# Altium PCB SmartToy_MainBoard_REV02 PCB.PcbDoc (part 2 of 3)
Units mm, origin at the board's own origin, x right, y up, seen from the top; angles counter-clockwise.
Board outline 55 x 50 mm, 2 copper layers (Top Layer, Bottom Layer), stack 0.98 mm thick; 120 components, 113 nets, 389 pads, 211 vias.
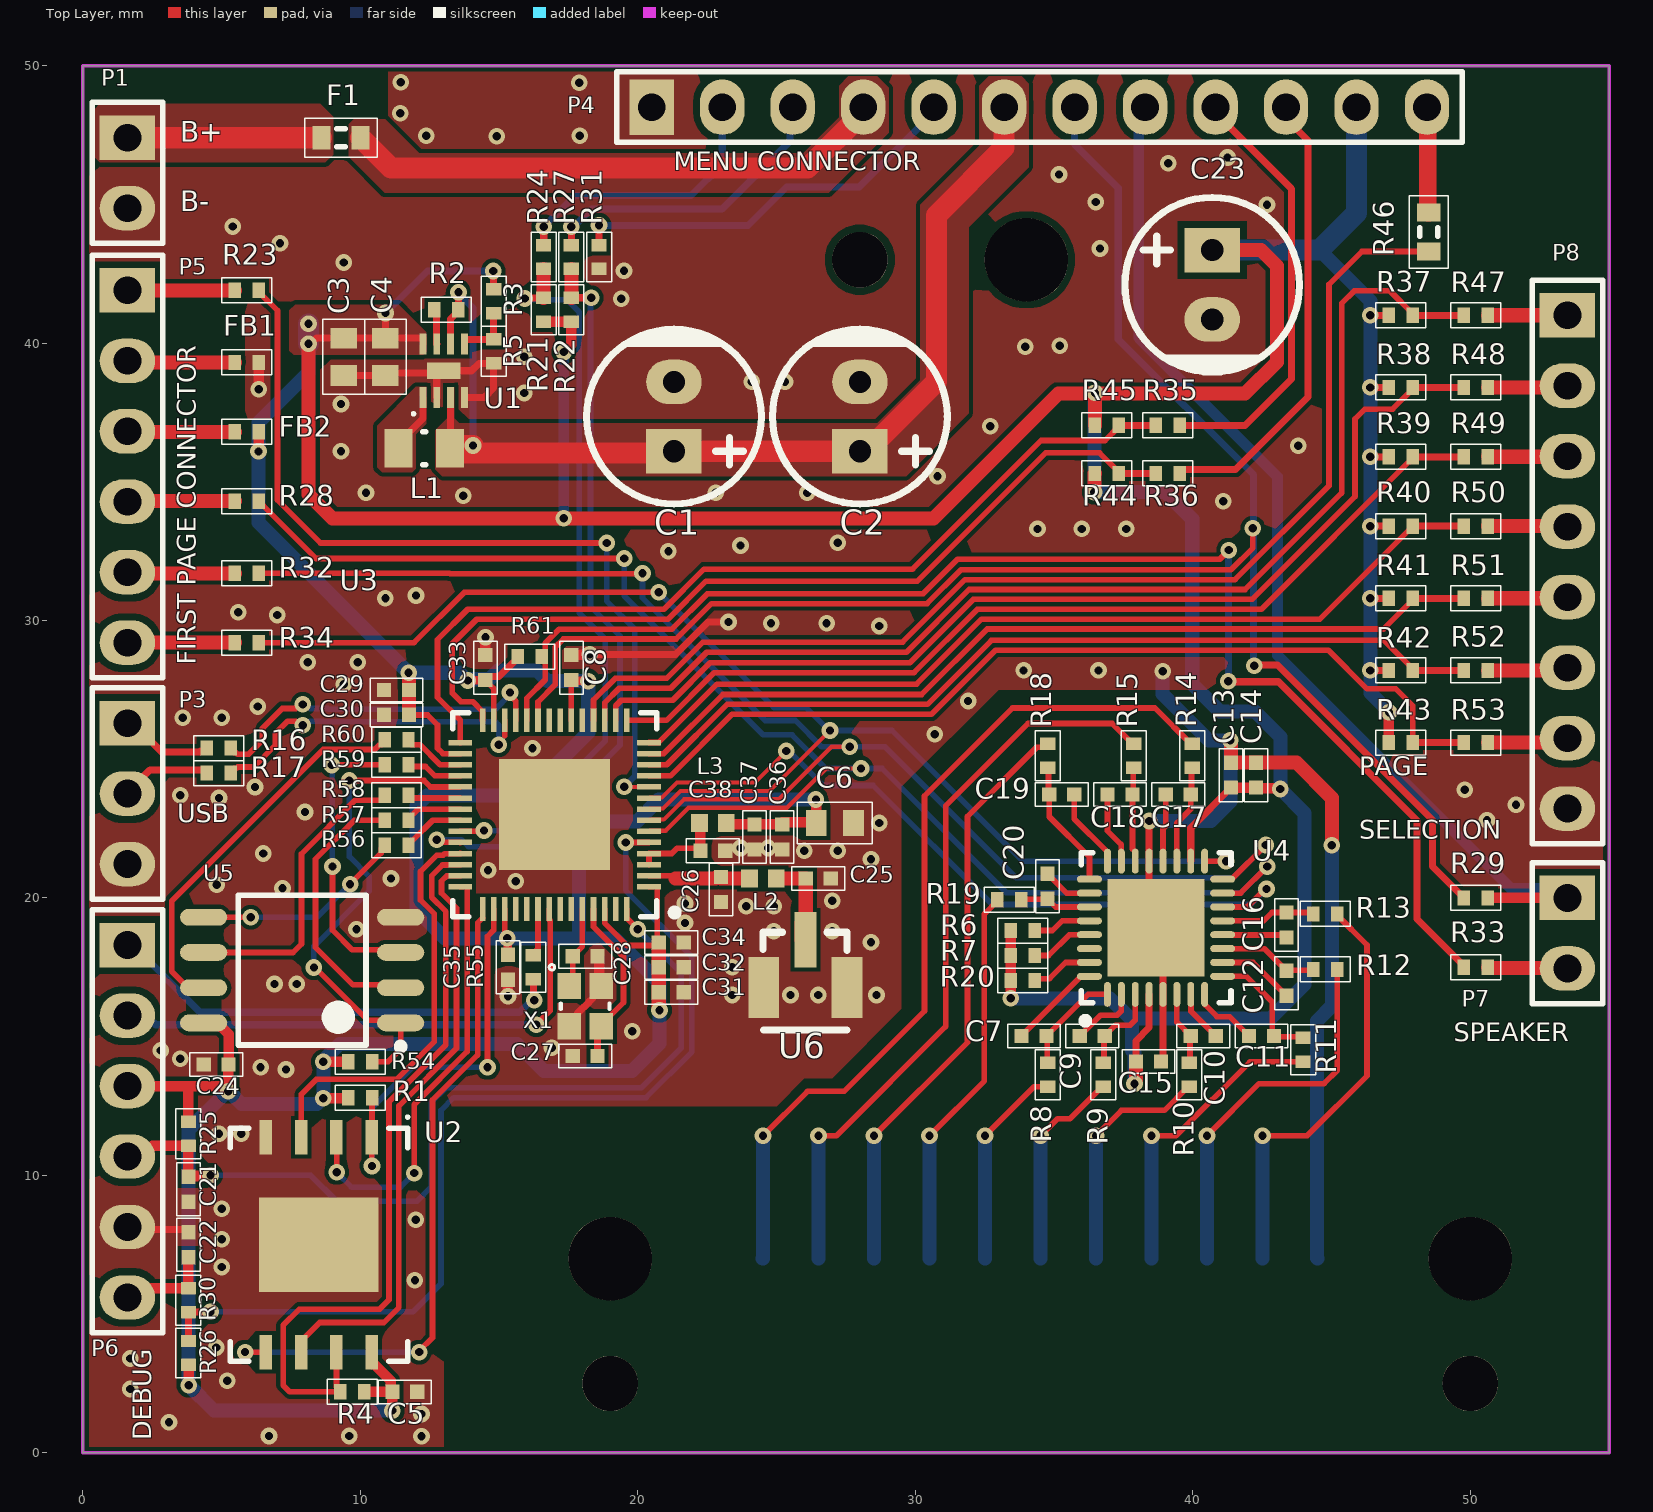
[diagram p0: Top Layer view]

## Part data (continued)
R6 R7 R8 R9 R10 R11 R12 R13 R14 R15 R18 R19: library part RES_SMD, "RES SMD 4.7K OHM 1% 1/16W 0402", Case Code (Imperial)=0402, Case Code (Metric)=1005, Manufacturer=Yageo, Manufacturer Part Number=RC0402FR-074K7L, Max Operating Temperature=155°C, Min Operating Temperature=-55°C, Power Rating=62.5mW, Resistance=4.7kR, Resistor Type="Thick Film", Supplier Part Number 1=311-4.7KLRCT-ND, Temperature Coefficient=100ppm/°C, Tolerance=1%, Voltage Rating=50V, Case/Package=0402, ComponentLink1Description=https://datasheet.ciiva.com/7850/1018594-7850022.pdf?src-supplier=Element14, ComponentLink1URL=https://datasheet.ciiva.com/7850/1018594-7850022.pdf?src-supplier=Element14, ComponentLink2Description=https://datasheet.ciiva.com/7850/1018594-7850023.pdf?src-supplier=Element14, ComponentLink2URL=https://datasheet.ciiva.com/7850/1018594-7850023.pdf?src-supplier=Element14, ComponentLink3Description=https://datasheet.ciiva.com/15215/getdatasheetpartid-328119-15215035.pdf?src-supplier=Verical, ComponentLink3URL=https://datasheet.ciiva.com/15215/getdatasheetpartid-328119-15215035.pdf?src-supplier=Verical, ComponentLink4Description=https://datasheet.ciiva.com/22661/1686128-22661342.pdf?src-supplier=Element14, ComponentLink4URL=https://datasheet.ciiva.com/22661/1686128-22661342.pdf?src-supplier=Element14, Depth=0.5mm, Height=0.32mm, Lead Free="Lead Free", Length=1mm, Military Standard=Not, Number of Pins=2, Packaging="Tape and Reel", Pricing 1="1 = 0.10000, 10 = 0.01400, 100 = 0.00580, 1000 = 0.00260, 2500 = 0.00226, 5000 = 0.00186 (USD)", REACH SVHC="No SVHC", RoHS=Yes, Stock 1=10584879, Supplier 1=Digi-Key, Termination=SMD/SMT, Voltage Rating (DC)=50V, Width=0.5mm
R16 R17: library part RES_SMD, "RES SMD 0 OHM JUMPER 1/16W 0402", Case Code (Imperial)=0402, Case Code (Metric)=1005, Manufacturer=Yageo, Manufacturer Part Number=RC0402FR-070RL, Max Operating Temperature=155°C, Min Operating Temperature=-55°C, Power Rating=62.5mW, Resistance=0mR, Resistor Type="Thick Film", Supplier Part Number 1=311-0.0LRCT-ND, Temperature Coefficient=200ppm/°C, Tolerance=1%, Voltage Rating=50V, Case/Package=0402, ComponentLink1Description=https://datasheet.ciiva.com/8896/pyu-rc0402-51-rohs-l-6-8896149.pdf?src-supplier=Avnet, ComponentLink1URL=https://datasheet.ciiva.com/8896/pyu-rc0402-51-rohs-l-6-8896149.pdf?src-supplier=Avnet, ComponentLink2Description=https://datasheet.ciiva.com/16790/pyu-rc0402-51-rohs-l-6-r-16790444.pdf?src-supplier=Future+Electronics, ComponentLink2URL=https://datasheet.ciiva.com/16790/pyu-rc0402-51-rohs-l-6-r-16790444.pdf?src-supplier=Future+Electronics, ComponentLink3Description=https://datasheet.ciiva.com/28419/pyu-rc0402-51-rohs-l-6-28419661.pdf?src-supplier=Avnet+Europe, ComponentLink3URL=https://datasheet.ciiva.com/28419/pyu-rc0402-51-rohs-l-6-28419661.pdf?src-supplier=Avnet+Europe, ComponentLink4Description=https://datasheet.ciiva.com/16869/pyu-rc0402-51-rohs-l-6-16869518.pdf?src-supplier=Avnet+Europe, ComponentLink4URL=https://datasheet.ciiva.com/16869/pyu-rc0402-51-rohs-l-6-16869518.pdf?src-supplier=Avnet+Europe, Contact Plating=Tin,Matte, Height=0.35mm, Lead Free="Lead Free", Length=1mm, Mount="Surface Mount", Packaging="Tape and Reel", Pricing 1="1 = 0.10000, 10 = 0.01200, 25 = 0.00840, 50 = 0.00640, 100 = 0.00470, 250 = 0.00360, 500 = 0.00288, 1000 = 0.00212, 5000 = 0.00152 (USD)", Radiation Hardening=No, RoHS=Yes, Stock 1=3964331, Supplier 1=Digi-Key, Termination=SMD/SMT, Width=0.5mm
R20 R21 R22 R37 R38 R39 R40 R41 R42 R43 R44 R45: library part RES_SMD, "RES SMD 100K OHM 1% 1/16W 0402", Case Code (Imperial)=0402, Case Code (Metric)=1005, Manufacturer=Yageo, Manufacturer Part Number=RC0402FR-07100KL, Max Operating Temperature=155°C, Max Power Dissipation=63mW, Min Operating Temperature=-55°C, Package Quantity=1, Resistance=100kR, Resistor Type="Thick Film", Supplier Part Number 1=311-100KJRCT-ND, Temperature Coefficient=100ppm/°C, Tolerance=1%, Voltage Rating=50V, Case/Package=0402, ComponentLink1Description=https://datasheet.ciiva.com/11808/0900766b80f96399-11808107.pdf?src-supplier=RSComponents, ComponentLink1URL=https://datasheet.ciiva.com/11808/0900766b80f96399-11808107.pdf?src-supplier=RSComponents, ComponentLink2Description=https://datasheet.ciiva.com/7983/443971-7983593.pdf?src-supplier=Element14, ComponentLink2URL=https://datasheet.ciiva.com/7983/443971-7983593.pdf?src-supplier=Element14, ComponentLink3Description=https://datasheet.ciiva.com/46440/1868787-46440889.pdf?src-supplier=Element14, ComponentLink3URL=https://datasheet.ciiva.com/46440/1868787-46440889.pdf?src-supplier=Element14, ComponentLink4Description=https://datasheet.ciiva.com/7746/1738695-7746234.pdf?src-supplier=Element14, ComponentLink4URL=https://datasheet.ciiva.com/7746/1738695-7746234.pdf?src-supplier=Element14, ComponentLink5Description=https://datasheet.ciiva.com/7746/1738695-7746235.pdf?src-supplier=Element14, ComponentLink5URL=https://datasheet.ciiva.com/7746/1738695-7746235.pdf?src-supplier=Element14, ComponentLink6Description=https://datasheet.ciiva.com/22747/443971-22747516.pdf?src-supplier=Element14, ComponentLink6URL=https://datasheet.ciiva.com/22747/443971-22747516.pdf?src-supplier=Element14, ComponentLink7Description=https://datasheet.ciiva.com/7850/1018594-7850133.pdf?src-supplier=Element14, ComponentLink7URL=https://datasheet.ciiva.com/7850/1018594-7850133.pdf?src-supplier=Element14, ComponentLink8Description=https://datasheet.ciiva.com/2491/pyu-r-int-thick-7-2491207.pdf?src-supplier=Digi-Key, ComponentLink8URL=https://datasheet.ciiva.com/2491/pyu-r-int-thick-7-2491207.pdf?src-supplier=Digi-Key, ComponentLink9Description=https://datasheet.ciiva.com/2491/pyu-r-int-thick-7-2491208.pdf?src-supplier=Digi-Key, ComponentLink9URL=https://datasheet.ciiva.com/2491/pyu-r-int-thick-7-2491208.pdf?src-supplier=Digi-Key, ComponentLink10Description=https://datasheet.ciiva.com/2491/pyu-r-int-thick-7-2491209.pdf?src-supplier=Digi-Key, ComponentLink10URL=https://datasheet.ciiva.com/2491/pyu-r-int-thick-7-2491209.pdf?src-supplier=Digi-Key, ComponentLink11Description=https://datasheet.ciiva.com/17052/pyu-rc0402-51-rohs-l-6-r-17052137.pdf?src-supplier=Future+Electronics, ComponentLink11URL=https://datasheet.ciiva.com/17052/pyu-rc0402-51-rohs-l-6-r-17052137.pdf?src-supplier=Future+Electronics, ComponentLink12Description=https://datasheet.ciiva.com/12668/pyu-rc0402-51-rohs-l-6-r-12668218.pdf?src-supplier=Mouser, ComponentLink12URL=https://datasheet.ciiva.com/12668/pyu-rc0402-51-rohs-l-6-r-12668218.pdf?src-supplier=Mouser, ComponentLink13Description=https://datasheet.ciiva.com/46394/1018594-46394941.pdf?src-supplier=Element14, ComponentLink13URL=https://datasheet.ciiva.com/46394/1018594-46394941.pdf?src-supplier=Element14, Depth=0.5mm, Features="Moisture Resistant", Height=0.016inch, Lead Free="Lead Free", Length=1mm, Military Standard=Not, Number of Terminations=2, Packaging="Tape and Reel", Power Rating=63mW, Pricing 1="1 = 0.10000, 10 = 0.01200, 100 = 0.00480, 1000 = 0.00215, 2500 = 0.00186, 5000 = 0.00154 (USD)", REACH SVHC=Unknown, RoHS=Yes, Stock 1=3850330, Supplier 1=Digi-Key, Termination=SMD/SMT, Width=0.02inch
R23 R24 R27 R28 R32 R34 R35 R36 R47 R48 R49 R50 R51 R52 R53: library part RES_SMD, "Surface Mount Chip Resistor, Thick Film, RC Series, 1 kohm, 62.5 mW, 1%, 50 V, 0402 [1005 Metric]", Case Code (Imperial)=0402, Case Code (Metric)=1005, Manufacturer 1=Yageo, Manufacturer Part Number 1=RC0402FR-071KL, Max Operating Temperature=155°C, Max Power Dissipation=63mW, Min Operating Temperature=-55°C, Power Rating=62.5mW, Resistance=1kR, Resistance Tolerance=1%, Resistor Type="Thick Film", Supplier Part Number 1=311-1.00KLRCT-ND, Temperature Coefficient=100ppm/°C, Voltage Rating=50V, Case/Package=0402, Category="Chip SMD Resistors", ComponentLink1Description=https://datasheet.ciiva.com/11819/0900766b80c66297-11819477.pdf?src-supplier=RSComponents, ComponentLink1URL=https://datasheet.ciiva.com/11819/0900766b80c66297-11819477.pdf?src-supplier=RSComponents, ComponentLink2Description=https://datasheet.ciiva.com/7983/1018594-7983502.pdf?src-supplier=Element14, ComponentLink2URL=https://datasheet.ciiva.com/7983/1018594-7983502.pdf?src-supplier=Element14, ComponentLink3Description=https://datasheet.ciiva.com/22747/1018594-22747513.pdf?src-supplier=Element14, ComponentLink3URL=https://datasheet.ciiva.com/22747/1018594-22747513.pdf?src-supplier=Element14, ComponentLink4Description=https://datasheet.ciiva.com/12666/pyu-rc0402-51-rohs-l-6-r-12666741.pdf?src-supplier=Mouser, ComponentLink4URL=https://datasheet.ciiva.com/12666/pyu-rc0402-51-rohs-l-6-r-12666741.pdf?src-supplier=Mouser, ComponentLink5Description=https://datasheet.ciiva.com/7849/1018594-7849869.pdf?src-supplier=Element14, ComponentLink5URL=https://datasheet.ciiva.com/7849/1018594-7849869.pdf?src-supplier=Element14, ComponentLink6Description=https://datasheet.ciiva.com/7849/1018594-7849871.pdf?src-supplier=Element14, ComponentLink6URL=https://datasheet.ciiva.com/7849/1018594-7849871.pdf?src-supplier=Element14, ComponentLink7Description=https://datasheet.ciiva.com/17063/pyu-rc0402-51-rohs-l-6-r-17063193.pdf?src-supplier=Future+Electronics, ComponentLink7URL=https://datasheet.ciiva.com/17063/pyu-rc0402-51-rohs-l-6-r-17063193.pdf?src-supplier=Future+Electronics, Construction=Rectangular, Depth=0.5mm, Features="Moisture Resistant", Height=0.32mm, Lead Free="Lead Free", Length=1mm, Military Standard=Not, Mouting Technology=SMT, Number of Pins=2, Number of Terminations=2, Packaging="Tape and Reel", Pin=2, Pricing 1="1=0.10000, 10=0.01600, 100=0.00660, 1000=0.00299, 2500=0.00259, 5000=0.00214 (USD)", REACH SVHC=Unknown, RoHS=Yes, RoHS Compliant=Yes, Series=RC, Size Code=0402, Supplier 1=Digi-Key, Technology="THICK FILM", Termination=SMD/SMT, Tolerance=1%, Voltage Rating (DC)=50V, Width=0.5mm
R25 R26 R61: library part RES_SMD, "RES SMD 10K OHM 1% 1/16W 0402", Case Code (Imperial)=0402, Case Code (Metric)=1005, Manufacturer=Yageo, Manufacturer Part Number=RC0402FR-0710KL, Max Operating Temperature=155°C, Min Operating Temperature=-55°C, Power Rating=62.5mW, Resistance=10kR, Supplier Part Number 1=311-10.0KLRTR-ND, Temperature Coefficient=100ppm/°C, Tolerance=1%, Voltage Rating=50V, Case/Package=0402, ComponentLink1Description=https://datasheet.ciiva.com/7660/38568-7660787.pdf?src-supplier=Element14, ComponentLink1URL=https://datasheet.ciiva.com/7660/38568-7660787.pdf?src-supplier=Element14, ComponentLink2Description=https://datasheet.ciiva.com/7849/1784430-7849813.pdf?src-supplier=Element14, ComponentLink2URL=https://datasheet.ciiva.com/7849/1784430-7849813.pdf?src-supplier=Element14, ComponentLink3Description=https://datasheet.ciiva.com/7849/1686128-7849814.pdf?src-supplier=Element14, ComponentLink3URL=https://datasheet.ciiva.com/7849/1686128-7849814.pdf?src-supplier=Element14, ComponentLink4Description=https://datasheet.ciiva.com/7849/1784430-7849815.pdf?src-supplier=Element14, ComponentLink4URL=https://datasheet.ciiva.com/7849/1784430-7849815.pdf?src-supplier=Element14, ComponentLink5Description=https://datasheet.ciiva.com/22747/1018594-22747512.pdf?src-supplier=Element14, ComponentLink5URL=https://datasheet.ciiva.com/22747/1018594-22747512.pdf?src-supplier=Element14, ComponentLink6Description=https://datasheet.ciiva.com/12667/pyu-rc0402-51-rohs-l-6-r-12667067.pdf?src-supplier=Mouser, ComponentLink6URL=https://datasheet.ciiva.com/12667/pyu-rc0402-51-rohs-l-6-r-12667067.pdf?src-supplier=Mouser, ComponentLink7Description=https://datasheet.ciiva.com/7983/1018594-7983486.pdf?src-supplier=Element14, ComponentLink7URL=https://datasheet.ciiva.com/7983/1018594-7983486.pdf?src-supplier=Element14, Composition="Thick Film", Depth=0.5mm, Height=0.32mm, Lead Free="Lead Free", Lead Pitch=0.2mm, Length=1mm, Military Standard=Not, Number of Pins=2, Number of Terminations=2, Packaging="Tape and Reel", Pricing 1="10000 = 0.001630, 30000 = 0.001440, 50000 = 0.001320, 100000 = 0.001290 (USD)", REACH SVHC="No SVHC", RoHS=Yes, Stock 1=58760000, Supplier 1=Digi-Key, Termination=SMD/SMT, Voltage Rating (DC)=50V, Width=0.5mm, Working Voltage=50V
R29 R33: library part RES_SMD, "YAGEO - RC0402FR-0727RL - Résistance à puce CMS, Couche épaisse, 0402 [1005 Metric], 27 ohm, Série RC, 50 V, Couche épaisse", Case Code (Imperial)=0402, Case Code (Metric)=1005, Manufacturer 1=Yageo, Manufacturer Part Number 1=RC0402FR-0727RL, Max Operating Temperature=155°C, Max Power Dissipation=63mW, Min Operating Temperature=-55°C, Power Rating=62.5mW, Resistance Tolerance=1%, Resistor Type="Thick Film", Supplier Part Number 1=YAG3086CT-ND, Temperature Coefficient=100ppm/°C, Voltage Rating=50V, Case/Package=0402, Category="Chip SMD Resistors", ComponentLink1Description=https://datasheet.ciiva.com/11808/0900766b80c66297-11808450.pdf?src-supplier=RSComponents, ComponentLink1URL=https://datasheet.ciiva.com/11808/0900766b80c66297-11808450.pdf?src-supplier=RSComponents, ComponentLink2Description=https://datasheet.ciiva.com/7849/1018594-7849926.pdf?src-supplier=Element14, ComponentLink2URL=https://datasheet.ciiva.com/7849/1018594-7849926.pdf?src-supplier=Element14, ComponentLink3Description=https://datasheet.ciiva.com/7849/1018594-7849927.pdf?src-supplier=Element14, ComponentLink3URL=https://datasheet.ciiva.com/7849/1018594-7849927.pdf?src-supplier=Element14, ComponentLink4Description=https://datasheet.ciiva.com/17044/pyu-rc0402-51-rohs-l-6-17044345.pdf?src-supplier=Future+Electronics, ComponentLink4URL=https://datasheet.ciiva.com/17044/pyu-rc0402-51-rohs-l-6-17044345.pdf?src-supplier=Future+Electronics, ComponentLink5Description=https://datasheet.ciiva.com/15189/getdatasheetpartid-327852-15189402.pdf?src-supplier=Verical, ComponentLink5URL=https://datasheet.ciiva.com/15189/getdatasheetpartid-327852-15189402.pdf?src-supplier=Verical, Construction=Rectangular, Depth=0.5mm, Features="Moisture Resistant", Height=0.016inch, Lead Free="Lead Free", Length=1mm, Military Standard=Not, Mouting Technology=SMT, Number of Terminations=2, Packaging="Tape and Reel", Pin=2, Pricing 1="1=0.10000, 10=0.01600, 100=0.00660, 1000=0.00299, 2500=0.00259, 5000=0.00214 (USD)", REACH SVHC=Unknown, Resistance=27R, RoHS=Yes, RoHS Compliant=Yes, Series=RC, Size Code=0402, Stock 1=378577, Supplier 1=Digi-Key, Technology="THICK FILM", Termination=SMD/SMT, Tolerance=1%, Weight=2.3E-05oz, Width=0.5mm
R30 R31: library part RES_SMD, "RES SMD 100 OHM 5% 1/16W 0402", Case Code (Imperial)=0402, Case Code (Metric)=1005, Manufacturer=Yageo, Manufacturer Part Number=RC0402FR-07100RL, Max Operating Temperature=155°C, Min Operating Temperature=-55°C, Power Rating=62.5mW, Resistance=100R, Resistor Type="Thick Film", Supplier Part Number 1=311-100LRCT-ND, Temperature Coefficient=100ppm/°C, Tolerance=1%, Voltage Rating=50V, Case/Package=0402, ComponentLink1Description=https://datasheet.ciiva.com/7850/1018594-7850134.pdf?src-supplier=Element14, ComponentLink1URL=https://datasheet.ciiva.com/7850/1018594-7850134.pdf?src-supplier=Element14, ComponentLink2Description=https://datasheet.ciiva.com/7850/1018594-7850135.pdf?src-supplier=Element14, ComponentLink2URL=https://datasheet.ciiva.com/7850/1018594-7850135.pdf?src-supplier=Element14, ComponentLink3Description=https://datasheet.ciiva.com/2452/pyu-r-int-thick-7-2452617.pdf?src-supplier=Digi-Key, ComponentLink3URL=https://datasheet.ciiva.com/2452/pyu-r-int-thick-7-2452617.pdf?src-supplier=Digi-Key, ComponentLink4Description=https://datasheet.ciiva.com/2452/pyu-r-int-thick-7-2452618.pdf?src-supplier=Digi-Key, ComponentLink4URL=https://datasheet.ciiva.com/2452/pyu-r-int-thick-7-2452618.pdf?src-supplier=Digi-Key, ComponentLink5Description=https://datasheet.ciiva.com/2452/pyu-r-int-thick-7-2452619.pdf?src-supplier=Digi-Key, ComponentLink5URL=https://datasheet.ciiva.com/2452/pyu-r-int-thick-7-2452619.pdf?src-supplier=Digi-Key, ComponentLink6Description=https://datasheet.ciiva.com/16740/pyu-rc0402-51-rohs-l-6-r-16740924.pdf?src-supplier=Future+Electronics, ComponentLink6URL=https://datasheet.ciiva.com/16740/pyu-rc0402-51-rohs-l-6-r-16740924.pdf?src-supplier=Future+Electronics, ComponentLink7Description=https://datasheet.ciiva.com/12577/pyu-rc0402-51-rohs-l-6-r-12577725.pdf?src-supplier=Mouser, ComponentLink7URL=https://datasheet.ciiva.com/12577/pyu-rc0402-51-rohs-l-6-r-12577725.pdf?src-supplier=Mouser, ComponentLink8Description=https://datasheet.ciiva.com/46394/1018594-46394943.pdf?src-supplier=Element14, ComponentLink8URL=https://datasheet.ciiva.com/46394/1018594-46394943.pdf?src-supplier=Element14, ComponentLink9Description=https://datasheet.ciiva.com/7849/1784430-7849810.pdf?src-supplier=Element14, ComponentLink9URL=https://datasheet.ciiva.com/7849/1784430-7849810.pdf?src-supplier=Element14, ComponentLink10Description=https://datasheet.ciiva.com/11808/0900766b80c66297-11808765.pdf?src-supplier=RSComponents, ComponentLink10URL=https://datasheet.ciiva.com/11808/0900766b80c66297-11808765.pdf?src-supplier=RSComponents, ComponentLink11Description=https://datasheet.ciiva.com/12667/pyu-rc0402-51-rohs-l-6-r-12667957.pdf?src-supplier=Mouser, ComponentLink11URL=https://datasheet.ciiva.com/12667/pyu-rc0402-51-rohs-l-6-r-12667957.pdf?src-supplier=Mouser, ComponentLink12Description=https://datasheet.ciiva.com/16740/pyu-rc0402-51-rohs-l-6-r-16740566.pdf?src-supplier=Future+Electronics, ComponentLink12URL=https://datasheet.ciiva.com/16740/pyu-rc0402-51-rohs-l-6-r-16740566.pdf?src-supplier=Future+Electronics, ComponentLink13Description=https://datasheet.ciiva.com/15189/getdatasheetpartid-329466-15189335.pdf?src-supplier=Verical, ComponentLink13URL=https://datasheet.ciiva.com/15189/getdatasheetpartid-329466-15189335.pdf?src-supplier=Verical, ComponentLink14Description=https://datasheet.ciiva.com/22747/1018594-22747511.pdf?src-supplier=Element14, ComponentLink14URL=https://datasheet.ciiva.com/22747/1018594-22747511.pdf?src-supplier=Element14, ComponentLink15Description=https://datasheet.ciiva.com/28367/1018594-28367226.pdf?src-supplier=Element14, ComponentLink15URL=https://datasheet.ciiva.com/28367/1018594-28367226.pdf?src-supplier=Element14, Depth=0.5mm, Height=0.32mm, Lead Free="Lead Free", Length=1mm, Military Standard=Not, Number of Pins=2, Packaging="Tape and Reel", Pricing 1="1 = 0.10000, 10 = 0.01400, 100 = 0.00580, 1000 = 0.00260, 2500 = 0.00226, 5000 = 0.00186 (USD)", REACH SVHC="No SVHC", RoHS=Yes, Stock 1=18149776, Supplier 1=Digi-Key, Termination=SMD/SMT, Voltage Rating (DC)=50V, Width=0.5mm
R46: library part RES_SMD, "YAGEO (PHYCOMP) - RC0603FR-07330RL - RES, THICK FILM, 330R, 1%, 0.1W, 0603", Case Code (Imperial)=0603, Case Code (Metric)=1608, Manufacturer 1=Yageo, Manufacturer Part Number 1=RC0603FR-07330RL, Max Operating Temperature=155°C, Max Power Dissipation=100mW, Min Operating Temperature=-55°C, Package Quantity=1, Resistance Tolerance=1%, Resistor Type="Thick Film", Supplier Part Number 1=311-330HRCT-ND, Temperature Coefficient=100ppm/°C, Voltage Rating=50V, Case/Package=0603, Category="Chip SMD Resistors", ComponentLink1Description=https://datasheet.ciiva.com/11819/0900766b80f96399-11819327.pdf?src-supplier=RSComponents, ComponentLink1URL=https://datasheet.ciiva.com/11819/0900766b80f96399-11819327.pdf?src-supplier=RSComponents, ComponentLink2Description=https://datasheet.ciiva.com/2454/pyu-r-int-thick-7-2454864.pdf?src-supplier=Digi-Key, ComponentLink2URL=https://datasheet.ciiva.com/2454/pyu-r-int-thick-7-2454864.pdf?src-supplier=Digi-Key, ComponentLink3Description=https://datasheet.ciiva.com/2454/pyu-r-int-thick-7-2454865.pdf?src-supplier=Digi-Key, ComponentLink3URL=https://datasheet.ciiva.com/2454/pyu-r-int-thick-7-2454865.pdf?src-supplier=Digi-Key, ComponentLink4Description=https://datasheet.ciiva.com/2454/pyu-r-int-thick-7-2454866.pdf?src-supplier=Digi-Key, ComponentLink4URL=https://datasheet.ciiva.com/2454/pyu-r-int-thick-7-2454866.pdf?src-supplier=Digi-Key, ComponentLink5Description=https://datasheet.ciiva.com/12555/rc0603-272842-12555334.pdf?src-supplier=Mouser, ComponentLink5URL=https://datasheet.ciiva.com/12555/rc0603-272842-12555334.pdf?src-supplier=Mouser, ComponentLink6Description=https://datasheet.ciiva.com/46440/1868787-46440904.pdf?src-supplier=Element14, ComponentLink6URL=https://datasheet.ciiva.com/46440/1868787-46440904.pdf?src-supplier=Element14, ComponentLink7Description=https://datasheet.ciiva.com/7746/443971-7746329.pdf?src-supplier=Element14, ComponentLink7URL=https://datasheet.ciiva.com/7746/443971-7746329.pdf?src-supplier=Element14, ComponentLink8Description=https://datasheet.ciiva.com/7746/443971-7746330.pdf?src-supplier=Element14, ComponentLink8URL=https://datasheet.ciiva.com/7746/443971-7746330.pdf?src-supplier=Element14, ComponentLink9Description=https://datasheet.ciiva.com/7746/1686128-7746331.pdf?src-supplier=Element14, ComponentLink9URL=https://datasheet.ciiva.com/7746/1686128-7746331.pdf?src-supplier=Element14, Depth=0.8mm, Features="Moisture Resistant", Height=0.45mm, Lead Free="Lead Free", Length=1.6mm, Mouting Technology=SMT, Number of Pins=2, Number of Terminations=2, Packaging="Tape and Reel", Pin=2, Power Rating=100mW, Pricing 1="1=0.10000, 10=0.02400, 100=0.00970, 1000=0.00436, 2500=0.00378 (USD)", REACH SVHC="No SVHC", Resistance=330R, RoHS=Yes, RoHS Compliant=Yes, Series=RC, Size Code=0603, Stock 1=1325793, Supplier 1=Digi-Key, Technology="THICK FILM", Termination=SMD/SMT, Tolerance=1%, Voltage Rating (DC)=50V, Width=0.8mm
R55: library part RES_SMD, "RES SMD 499 OHM 5% 1/16W 0402", Case Code (Imperial)=0402, Case Code (Metric)=1005, Manufacturer 1=Yageo, Manufacturer Part Number 1=RC0402FR-07499RL, Max Operating Temperature=155°C, Max Power Dissipation=63mW, Min Operating Temperature=-55°C, Package Quantity=1, Power Rating=62.5mW, Resistance=499R, Resistance Tolerance=1%, Resistor Type="Thick Film", Supplier Part Number 1=311-499LRCT-ND, Temperature Coefficient=100ppm/°C, Voltage Rating=50V, Case/Package=0402, Category="Chip SMD Resistors", ComponentLink1Description=https://datasheet.ciiva.com/2453/pyu-r-int-thick-7-2453538.pdf?src-supplier=Digi-Key, ComponentLink1URL=https://datasheet.ciiva.com/2453/pyu-r-int-thick-7-2453538.pdf?src-supplier=Digi-Key, ComponentLink2Description=https://datasheet.ciiva.com/2453/pyu-r-int-thick-7-2453539.pdf?src-supplier=Digi-Key, ComponentLink2URL=https://datasheet.ciiva.com/2453/pyu-r-int-thick-7-2453539.pdf?src-supplier=Digi-Key, ComponentLink3Description=https://datasheet.ciiva.com/2453/pyu-r-int-thick-7-2453540.pdf?src-supplier=Digi-Key, ComponentLink3URL=https://datasheet.ciiva.com/2453/pyu-r-int-thick-7-2453540.pdf?src-supplier=Digi-Key, Construction=Rectangular, Depth=0.5mm, Features="Moisture Resistant", Height=0.016inch, Lead Free="Lead Free", Length=1mm, Military Standard=Not, Mouting Technology=SMT, Number of Terminations=2, Packaging="Tape and Reel", Pin=2, Pricing 1="1=0.10000, 10=0.01600, 100=0.00660, 1000=0.00299, 2500=0.00259, 5000=0.00214 (USD)", REACH SVHC="No SVHC", RoHS=Yes, RoHS Compliant=Yes, Series=RC, Size Code=0402, Stock 1=2245904, Supplier 1=Digi-Key, Termination=SMD/SMT, Tolerance=1%, Voltage Rating (DC)=50V, Width=0.02inch
R56 R57 R58 R59 R60: library part RES_SMD, "RES SMD 0 OHM JUMPER 1/16W 0402", Case Code (Imperial)=0402, Case Code (Metric)=1005, Manufacturer 1=Yageo, Manufacturer Part Number 1=RC0402FR-070RL, Max Operating Temperature=155°C, Max Power Dissipation=63mW, Min Operating Temperature=-55°C, Power Rating=62.5mW, Resistance=0R, Resistor Type="Thick Film", Supplier Part Number 1=603-RC0402FR-070RL, Temperature Coefficient=200ppm/°C, Tolerance=1%, Voltage Rating=50V, Case/Package=0402, Category="Chip SMD Resistors", ComponentLink1Description=https://datasheet.ciiva.com/8896/pyu-rc0402-51-rohs-l-6-8896149.pdf?src-supplier=Avnet, ComponentLink1URL=https://datasheet.ciiva.com/8896/pyu-rc0402-51-rohs-l-6-8896149.pdf?src-supplier=Avnet, ComponentLink2Description=https://datasheet.ciiva.com/16790/pyu-rc0402-51-rohs-l-6-r-16790444.pdf?src-supplier=Future+Electronics, ComponentLink2URL=https://datasheet.ciiva.com/16790/pyu-rc0402-51-rohs-l-6-r-16790444.pdf?src-supplier=Future+Electronics, ComponentLink3Description=https://datasheet.ciiva.com/28419/pyu-rc0402-51-rohs-l-6-28419661.pdf?src-supplier=Avnet+Europe, ComponentLink3URL=https://datasheet.ciiva.com/28419/pyu-rc0402-51-rohs-l-6-28419661.pdf?src-supplier=Avnet+Europe, ComponentLink4Description=https://datasheet.ciiva.com/16869/pyu-rc0402-51-rohs-l-6-16869518.pdf?src-supplier=Avnet+Europe, ComponentLink4URL=https://datasheet.ciiva.com/16869/pyu-rc0402-51-rohs-l-6-16869518.pdf?src-supplier=Avnet+Europe, Contact Plating=Tin,Matte, Features="Moisture Resistant", Height=0.35mm, Lead Free="Lead Free", Length=1mm, Mount="Surface Mount", Mouting Technology=SMT, Number of Terminations=2, Packaging="Tape and Reel", Pin=2, Pricing 1="1=0.10000, 10=0.01000, 50=0.01000, 100=0.00400, 1000=0.00300, 10000=0.00200 (USD)", Radiation Hardening=No, RoHS=Yes, RoHS Compliant=Yes, Series=RC, Size Code=0402, Stock 1=204375, Supplier 1=Mouser, Termination=SMD/SMT, Width=0.5mm
U1: "IC REG BOOST ADJ 3.8A 8TDFN", Manufacturer 1=Microchip, Supplier Part Number 1=576-4863-1-ND, Category="Voltage Regulators - Switching", ComponentLink1Description=http://www.microchip.com/mymicrochip/filehandler.aspx?ddocname=en580778&src-supplier=Digi-Key, ComponentLink1URL=http://www.microchip.com/mymicrochip/filehandler.aspx?ddocname=en580778&src-supplier=Digi-Key, Manufacturer Part Number 1=MIC2875-AYMT-T5, Pricing 1="1=1.27000, 25=1.05000, 100=0.96000 (USD)", RoHS=No, Stock 1=322, Supplier 1=Digi-Key
U2: "IC FLASH 1G SPI 104MHZ 8WSON", Frequency=104MHz, Manufacturer 1=Winbond, Max Operating Temperature=85°C, Min Operating Temperature=-40°C, Supplier Part Number 1=W25N01GVZEIGCT-ND, Category=Memory, ComponentLink1Description=http://www.winbond.com/resource-files/w25n01gv%20revl%20050918%20unsecured.pdf?src-supplier=Digi-Key, ComponentLink1URL=http://www.winbond.com/resource-files/w25n01gv%20revl%20050918%20unsecured.pdf?src-supplier=Digi-Key, Interface=SPI,Serial, Manufacturer Part Number 1="W25N01GVZEIG TR", Memory Type=FLASH,NAND, Packaging="Tape and Reel", Pricing 1="1=3.21000, 10=2.88200, 25=2.83760, 50=2.83000, 100=2.52870, 250=2.44564, 500=2.43672, 1000=2.26904 (USD)", RoHS=Yes, RoHS Compliant=Yes, Stock 1=33713, Supplier 1=Digi-Key
U3: "RF System on a Chip - SoC SMD Wi-Fi IC, ESP32-S2, singal-core MCU, QFN 56-pin, 7*7 mm", Manufacturer 1="Espressif Systems", Manufacturer Part Number 1=ESP32-S2
U4: "Capacitive Touch Screen 11 Key 32-Pin VQFN EP T/R", Manufacturer 1=Microchip, Supplier Part Number 1=AT42QT1110-MURCT-ND, ComponentLink1Description=http://www.microchip.com/mymicrochip/filehandler.aspx?ddocname=en590256&src-supplier=Digi-Key, ComponentLink1URL=http://www.microchip.com/mymicrochip/filehandler.aspx?ddocname=en590256&src-supplier=Digi-Key, Manufacturer Part Number 1=AT42QT1110-MUR, Pricing 1="1=1.16000, 25=1.06000, 100=0.96200 (USD)", RoHS=No, Stock 1=4052, Supplier 1=Digi-Key
U5: library part "W25N01GVZEIG TR", "IC FLASH 128MBIT SPI/QUAD 8SOIC", Case/Package=SOIC, Frequency=133MHz, Manufacturer 1=Winbond, Max Operating Temperature=85°C, Min Operating Temperature=-40°C, Supplier Part Number 1=W25Q128JVSIM-ND, Category=Memory, ComponentLink1Description=http://www.winbond.com/resource-files/w25n01gv%20revl%20050918%20unsecured.pdf?src-supplier=Digi-Key, ComponentLink1URL=http://www.winbond.com/resource-files/w25n01gv%20revl%20050918%20unsecured.pdf?src-supplier=Digi-Key, ComponentLink2Description=http://www.winbond.com/resource-files/w25q128jv_dtr%20revc%2003272018%20plus.pdf?src-supplier=Digi-Key, ComponentLink2URL=http://www.winbond.com/resource-files/w25q128jv_dtr%20revc%2003272018%20plus.pdf?src-supplier=Digi-Key, Manufacturer Part Number 1=W25Q128JVSIM, Memory Size=128Mb, Memory Type=Non-Volatile,FLASH, Mount="Surface Mount", Packaging=Rail/Tube, Pricing 1="1=1.62000, 10=1.48100, 25=1.44080, 50=1.43360, 100=1.28140, 250=1.27772, 500=1.25844, 1000=1.20501, 5000=1.12190 (USD)", RoHS=Yes, RoHS Compliant=Yes, Stock 1=4617, Supplier 1=Digi-Key
U6: library part AntenaIPX, "CONN UMCC JACK STR 50OHM SMD", Case/Package=SMD/SMT, Dielectric Material=Polymer, Frequency=6GHz, Housing Color=Beige, Manufacturer="TE Connectivity AMP", Max Operating Temperature=194°C, Min Operating Temperature=-40°C, Package Quantity=1, Supplier Part Number 1=A118077CT-ND, Body Material="Polymer,Liquid Crystal Polymer", Body Plating=Gold, ComponentLink1Description=https://datasheet.ciiva.com/16312/eng-cd-1909763-b-16312469.pdf?src-supplier=Future+Electronics, ComponentLink1URL=https://datasheet.ciiva.com/16312/eng-cd-1909763-b-16312469.pdf?src-supplier=Future+Electronics, ComponentLink2Description=https://datasheet.ciiva.com/16469/eng-cd-1909763-b-16469221.pdf?src-supplier=Avnet+Asia, ComponentLink2URL=https://datasheet.ciiva.com/16469/eng-cd-1909763-b-16469221.pdf?src-supplier=Avnet+Asia, ComponentLink3Description=https://datasheet.ciiva.com/9423/eng-cd-1909763-b-9423785.pdf?src-supplier=Avnet, ComponentLink3URL=https://datasheet.ciiva.com/9423/eng-cd-1909763-b-9423785.pdf?src-supplier=Avnet, ComponentLink4Description=https://datasheet.ciiva.com/29191/eng-cd-1909763-b1-basefilename-29191146.pdf?src-supplier=Digi-Key, ComponentLink4URL=https://datasheet.ciiva.com/29191/eng-cd-1909763-b1-basefilename-29191146.pdf?src-supplier=Digi-Key, ComponentLink5Description=https://datasheet.ciiva.com/29191/eng-cd-1909763-b1-basefilename-29191148.pdf?src-supplier=Digi-Key, ComponentLink5URL=https://datasheet.ciiva.com/29191/eng-cd-1909763-b1-basefilename-29191148.pdf?src-supplier=Digi-Key, Connector System=Cable-to-Board, Connector Type=Jack, Contact Material="Copper Alloy", Contact Plating=Gold, ELV=Compliant, Fastening Type=Push,Pull, Gender=Female, Impedance=50R, Insulation Material=Thermoplastic, Lead Free="Lead Free", Length=3mm, Manufacturer Part Number=1909763-1, Max Frequency=6GHz, Mount=Panel, Number of Positions=1, Orientation=Straight, Packaging="Tape and Reel", Pricing 1="1 = 0.46000, 10 = 0.42900, 25 = 0.38600, 50 = 0.34300, 100 = 0.32860, 250 = 0.30008, 500 = 0.28578, 1000 = 0.23577, 2500 = 0.21434 (USD)", Radiation Hardening=No, RoHS=Yes, Sealable="No (Without)", Stock 1=175154, Supplier 1=Digi-Key, Termination=SMD/SMT
X1: library part "FA-128 32.0000MF10Z-AJ3", "CRYSTAL 40.0000MHZ 8PF SMD", Case/Package=DFN, Continuous Drain Current (ID)=22A, Drain to Source Voltage (Vdss)=60V, ESR (Equivalent Series Resistance)=60R, Frequency Stability=10ppm, Input Capacitance=2.2nF, Load Capacitance=8pF, Manufacturer 1=Abracon, Manufacturer Part Number 1=ABM11W-40.0000MHZ-8-B1U-T3, Max Operating Temperature=175°C, Max Power Dissipation=79W, Min Operating Temperature=-55°C, Supplier Part Number 1=535-13918-1-ND, ComponentLink1Description=https://abracon.com/Resonators/ABM11W.pdf?src-supplier=Digi-Key, ComponentLink1URL=https://abracon.com/Resonators/ABM11W.pdf?src-supplier=Digi-Key, Frequency=40MHz, Frequency Tolerance=10ppm, Mount="Surface Mount", Packaging="Cut Tape", Pricing 1="1=0.78000, 10=0.69000, 50=0.64500, 100=0.57000, 500=0.54000 (USD)", Rds On Max=4mR, RoHS=Yes, Stock 1=770, Supplier 1=Digi-Key

## Free pads (board coordinates)
  round 3 hole 3 unplated: H1(19,7) H3(50,7) H6(34,43)
  round 2 hole 2 unplated: H2(19,2.5) H4(50,2.5) H5(28,43)

## Via types
v1: diameter 0.6, hole 0.3, Top Layer to Bottom Layer, tented both sides, 211 vias

## Nets (pads, with @x,y where several pads share a name; then routed paths per layer and width w, separated by ;. In a path a pad name is that pad's centre, name@x,y a point inside that pad or via, vN(x,y) a via of type N, cw(c..) or ccw(c..) an arc to the next point about the centre after c; other vN are vias at no path point)
+3.3V: C3.2 C4.2 C5.2 C6.2 C8.2 C13.1 C14.1 C15.1 C23.1 C24.2 C29.2 C30.2 C31.2 C32.2 C33.2 C34.2 C35.2 C36.2 C37.2 FB2.1 L3.1 P4.11 P6.3 R1.2 R3.2 R4.2 R6.1 R7.1 R20.2 R21.2 R22.2 R25.2 R26.2 R37.2 R38.2 R39.2 R40.2 R41.2 R42.2 R43.2 R44.2 R45.2 R54.2 R61.2 U1.8 U2.8 U3.1 U3.20 U3.27 U3.30 U3.45 U3.54 U4.4 U4.18 U5.8 | length 289.6
  Top Layer w0.203: C30.2@11.75,26.6 11.756,26.594 12.421,26.594 12.776,26.238 12.776,25.396 12.972,25.2 U3.30@13.6,25.2 ; C33.2@14.5,27.85 14.8,27.55 U3.27@14.8,26.4 ; v1@15.2,18.542 U3.45@15.2,19.6 ; C35.2@15.211,17.846 C35.2@15.316,17.951 ; U3.20@17.6,26.4 C8.2@17.6,27.85 ; U3.54@18.8,19.6 18.8,19.097 19.609,18.288 20.638,18.288 C34.2@20.75,18.4 ; U3.1@20.4,20.4 20.699,20.4 20.701,20.398 C34.2@20.701,18.449
  Top Layer w0.254: v1(8.128,39.98) 8.222,39.98 8.417,40.175 C3.2@9.4,40.175 ; C3.2@9.4,40.184 10.891,40.184 C4.2@10.9,40.175 ; v1(10.905,41.083) 10.905,40.18 C4.2@10.9,40.175 ; U1.8@12.25,39.965 12.25,40.173 12.248,40.175 C4.2@10.9,40.175 ; C33.2@14.5,27.85 14.628,27.978 14.996,27.978 15.668,28.65 R61.2@15.668,28.7 ; v1(14.783,42.596) 14.791,42.587 14.791,41.94 R3.2@14.8,41.932 ; C15.1@37.95,14.1 37.95,14.85 38.425,15.325 U4.4@38.425,16.525 ; U4.18@39.925,21.325 39.925,22.525 C13.1@41.375,23.975 ; v1(46.4,28.2) R42.2@47.068,28.2 ; v1(46.4,30.8) R41.2@47.068,30.8 ; v1(46.4,33.4) R40.2@47.068,33.4 ; v1(46.4,35.9) R39.2@47.068,35.9 ; v1(46.4,38.4) R38.2@47.068,38.4 ; v1(46.4,41) R37.2@47.068,41
  Top Layer w0.305: v1(13.868,27.838) 13.874,27.844 14.494,27.844 C33.2@14.5,27.85 ; C35.2@15.211,17.846 15.303,17.938 15.303,18.529 v1(15.291,18.542) ; C8.2@17.6,27.85 17.618,27.831 18.193,27.831 v1(18.212,27.813)
  Top Layer w0.381: P6.3@1.6,13.22 3.826,13.22 ; R26.2@3.8,3.168 3.805,3.163 3.805,2.443 v1(3.81,2.438) ; R25.2@3.8,11.932 3.8,13.194 3.826,13.22 ; U5.8@4.35,15.495 4.841,15.495 5.25,15.086 C24.2@5.25,14 5.241,13.991 5.241,13.044 v1(5.232,13.035) ; v1@5.258,13.233 5.244,13.22 3.826,13.22 ; v1(6.325,36.093) 6.328,36.097 6.328,36.796 FB2.1@6.332,36.8 ; v1(8.661,12.776) 8.673,12.788 9.556,12.788 R1.2@9.568,12.8 ; v1(8.661,14.097) 8.663,14.099 9.567,14.099 R54.2@9.568,14.1 ; R4.2@10.132,2.2 11.085,2.2 11.085,2.605 10.495,3.196 10.44,3.196 10.405,3.23 U2.8@10.405,3.63 ; v1(11.151,1.524) C5.2@11.15,2.2 ; R21.2@16.6,40.768 R22.2@17.6,40.768 ; v1(17.33,39.673) 17.6,39.943 17.6,40.734 17.635,40.768 17.65,40.768 17.685,40.734 R22.2@17.685,40.682 ; L3.1@23.18,22.7 23.23,22.65 C37.2@24.2,22.65 C36.2@25.2,22.65 ; C36.2@25.225,22.725 26.4,22.725 C6.2@26.421,22.704 ; v1(26.416,23.546) 26.421,23.541 C6.2@26.421,22.704 ; C6.2@26.425,22.7 C6.2@26.421,22.704 ; v1(33.436,16.383) 33.443,16.39 R20.2@33.443,17.025 R7.1@33.443,17.925 R6.1@33.443,18.825 ; C13.1@41.375,23.975 C14.1@42.275,23.975 42.299,23.951 43.131,23.951 v1(43.155,23.927) ; R43.2@47.068,25.6 v1(47.068,26.693)
  Top Layer w0.508: v1(8.128,39.98) 8.128,34.544 8.992,33.68 v1(17.323,33.68) 30.658,33.68 35.154,38.177 v1@36.471,38.177 ; v1(11.735,28.118) 11.749,28.104 11.749,27.501 C29.2@11.75,27.5 C30.2@11.75,26.6 ; C34.2@20.75,18.4 C32.2@20.75,17.5 C31.2@20.75,16.6 C31.2@20.75,16.6 20.751,16.002 20.777,15.976 v1(20.777,15.951) ; v1(36.449,34.62) 36.459,34.63 36.459,35.29 R44.2@36.468,35.3 ; R45.2@36.468,37.033 36.471,37.036 v1@36.471,38.177 ; v1(36.474,38.202) 36.471,38.198 v1@36.471,38.177 ; v1(37.9,13.3) 37.9,13.325 37.949,13.374 37.949,14.099 C15.1@37.95,14.1 ; C23.1@40.7,43.35 42.451,43.35 43.028,42.774 43.028,39.319 41.885,38.177 v1@36.471,38.177
  Bottom Layer w0.254: v1(10.905,41.083) 12.418,42.596 v1(14.783,42.596)
  Bottom Layer w0.381: v1(17.323,33.68) 17.327,33.684 17.327,39.67 v1(17.33,39.673)
  Bottom Layer w0.508: v1(8.128,39.98) 8.128,38.938 6.325,37.135 v1(6.325,36.093) 6.325,33.528 v1(11.735,28.118) 13.564,28.118 13.844,27.838 v1(13.868,27.838) 13.91,27.88 14.647,27.88 14.961,28.194 16.366,28.194 16.747,27.813 v1(18.212,27.813) 18.212,25.959 15.951,23.698 12.395,23.698 12.014,23.317 12.014,19.571 13.043,18.542 v1(15.291,18.542) 17.903,18.542 ; v1(11.151,1.524) 4.724,1.524 v1(3.81,2.438) 3.81,11.648 5.151,12.989 5.161,12.989 5.227,13.055 5.237,13.055 5.718,12.573 8.433,12.573 8.637,12.776 v1(8.661,12.776) v1(8.661,14.097) 8.661,14.148 9.246,14.732 15.646,14.732 16.612,13.767 19.787,13.767 20.777,14.757 v1(20.777,15.951) 20.777,16.942 19.177,18.542 17.903,18.542 ; v1(26.416,23.546) 20.752,23.546 19.964,22.758 18.237,22.758 17.882,22.403 17.882,18.563 17.903,18.542 ; v1(33.436,16.383) 37.018,16.383 37.75,15.65 ; v1(36.449,34.62) v1@36.46,34.632 ; v1(36.474,38.202) 36.462,38.189 36.462,34.633 v1@36.46,34.632 ; v1(37.9,13.3) 37.9,14.413 37.805,14.508 37.805,15.595 37.75,15.65 ; 44.569,43.35 46.4,41.519 v1(46.4,41) v1(46.4,38.4) v1(46.4,35.9) v1(46.4,33.4) v1(46.4,30.8) v1(46.4,28.2) 46.4,27.387 47.068,26.718 v1(47.068,26.693) ; v1@36.46,34.632 39.003,34.632 39.98,33.655 39.98,27.711 40.97,26.721 42.24,26.721 43.155,25.806 v1(43.155,23.927) 44.028,23.053 44.028,16.875 42.803,15.65 37.75,15.65
  Bottom Layer w0.762: v1(8.128,39.98) v1(8.128,40.691) ; C23.1@40.7,43.35 44.569,43.35 45.9,44.681 P4.11@45.9,48.5
BAT_IN: F1.1 P1.1 | length 7
  Top Layer w0.762: P1.1@1.6,47.4 F1.1@8.6,47.4
BOOK_MODE: R22.1 R27.1 U3.38 | length 27.4
  Top Layer w0.203: v1(12.751,22.098) 12.858,22.098 12.955,22.002 13.598,22.002 U3.38@13.6,22
  Top Layer w0.254: R22.1@17.6,41.632 v1(18.313,41.631)
  Top Layer w0.508: R22.1@17.6,41.632 R27.1@17.6,42.668
  Bottom Layer w0.203: v1(12.751,22.098) 13.644,22.098 13.893,21.849 15.702,21.849 19.355,25.502 19.355,29.439 18.293,30.501 18.293,41.61 v1(18.313,41.631)
BUTTON: R36.1 R44.1 U3.28 | length 32
  Top Layer w0.203: U3.28@14.4,26.4 14.4,26.722 14.045,27.076 13.614,27.076 13.31,27.381 13.31,29.159 14.194,30.043 21.082,30.043 22.458,31.42 30.074,31.42 34.696,36.043 36.639,36.043 37.332,35.35 R44.1@37.332,35.3
  Top Layer w0.254: R44.1@37.332,35.3 R36.1@38.668,35.3